# Altium PCB PES_BOARD_V2023.PcbDoc (part 3 of 3)
Units mm, origin at the board's own origin, x right, y up, seen from the top; angles counter-clockwise.
Board outline 110.62 x 70.82 mm, 2 copper layers (Top Layer, Bottom Layer), stack 0.325 mm thick; 197 components, 152 nets, 714 pads, 351 vias.
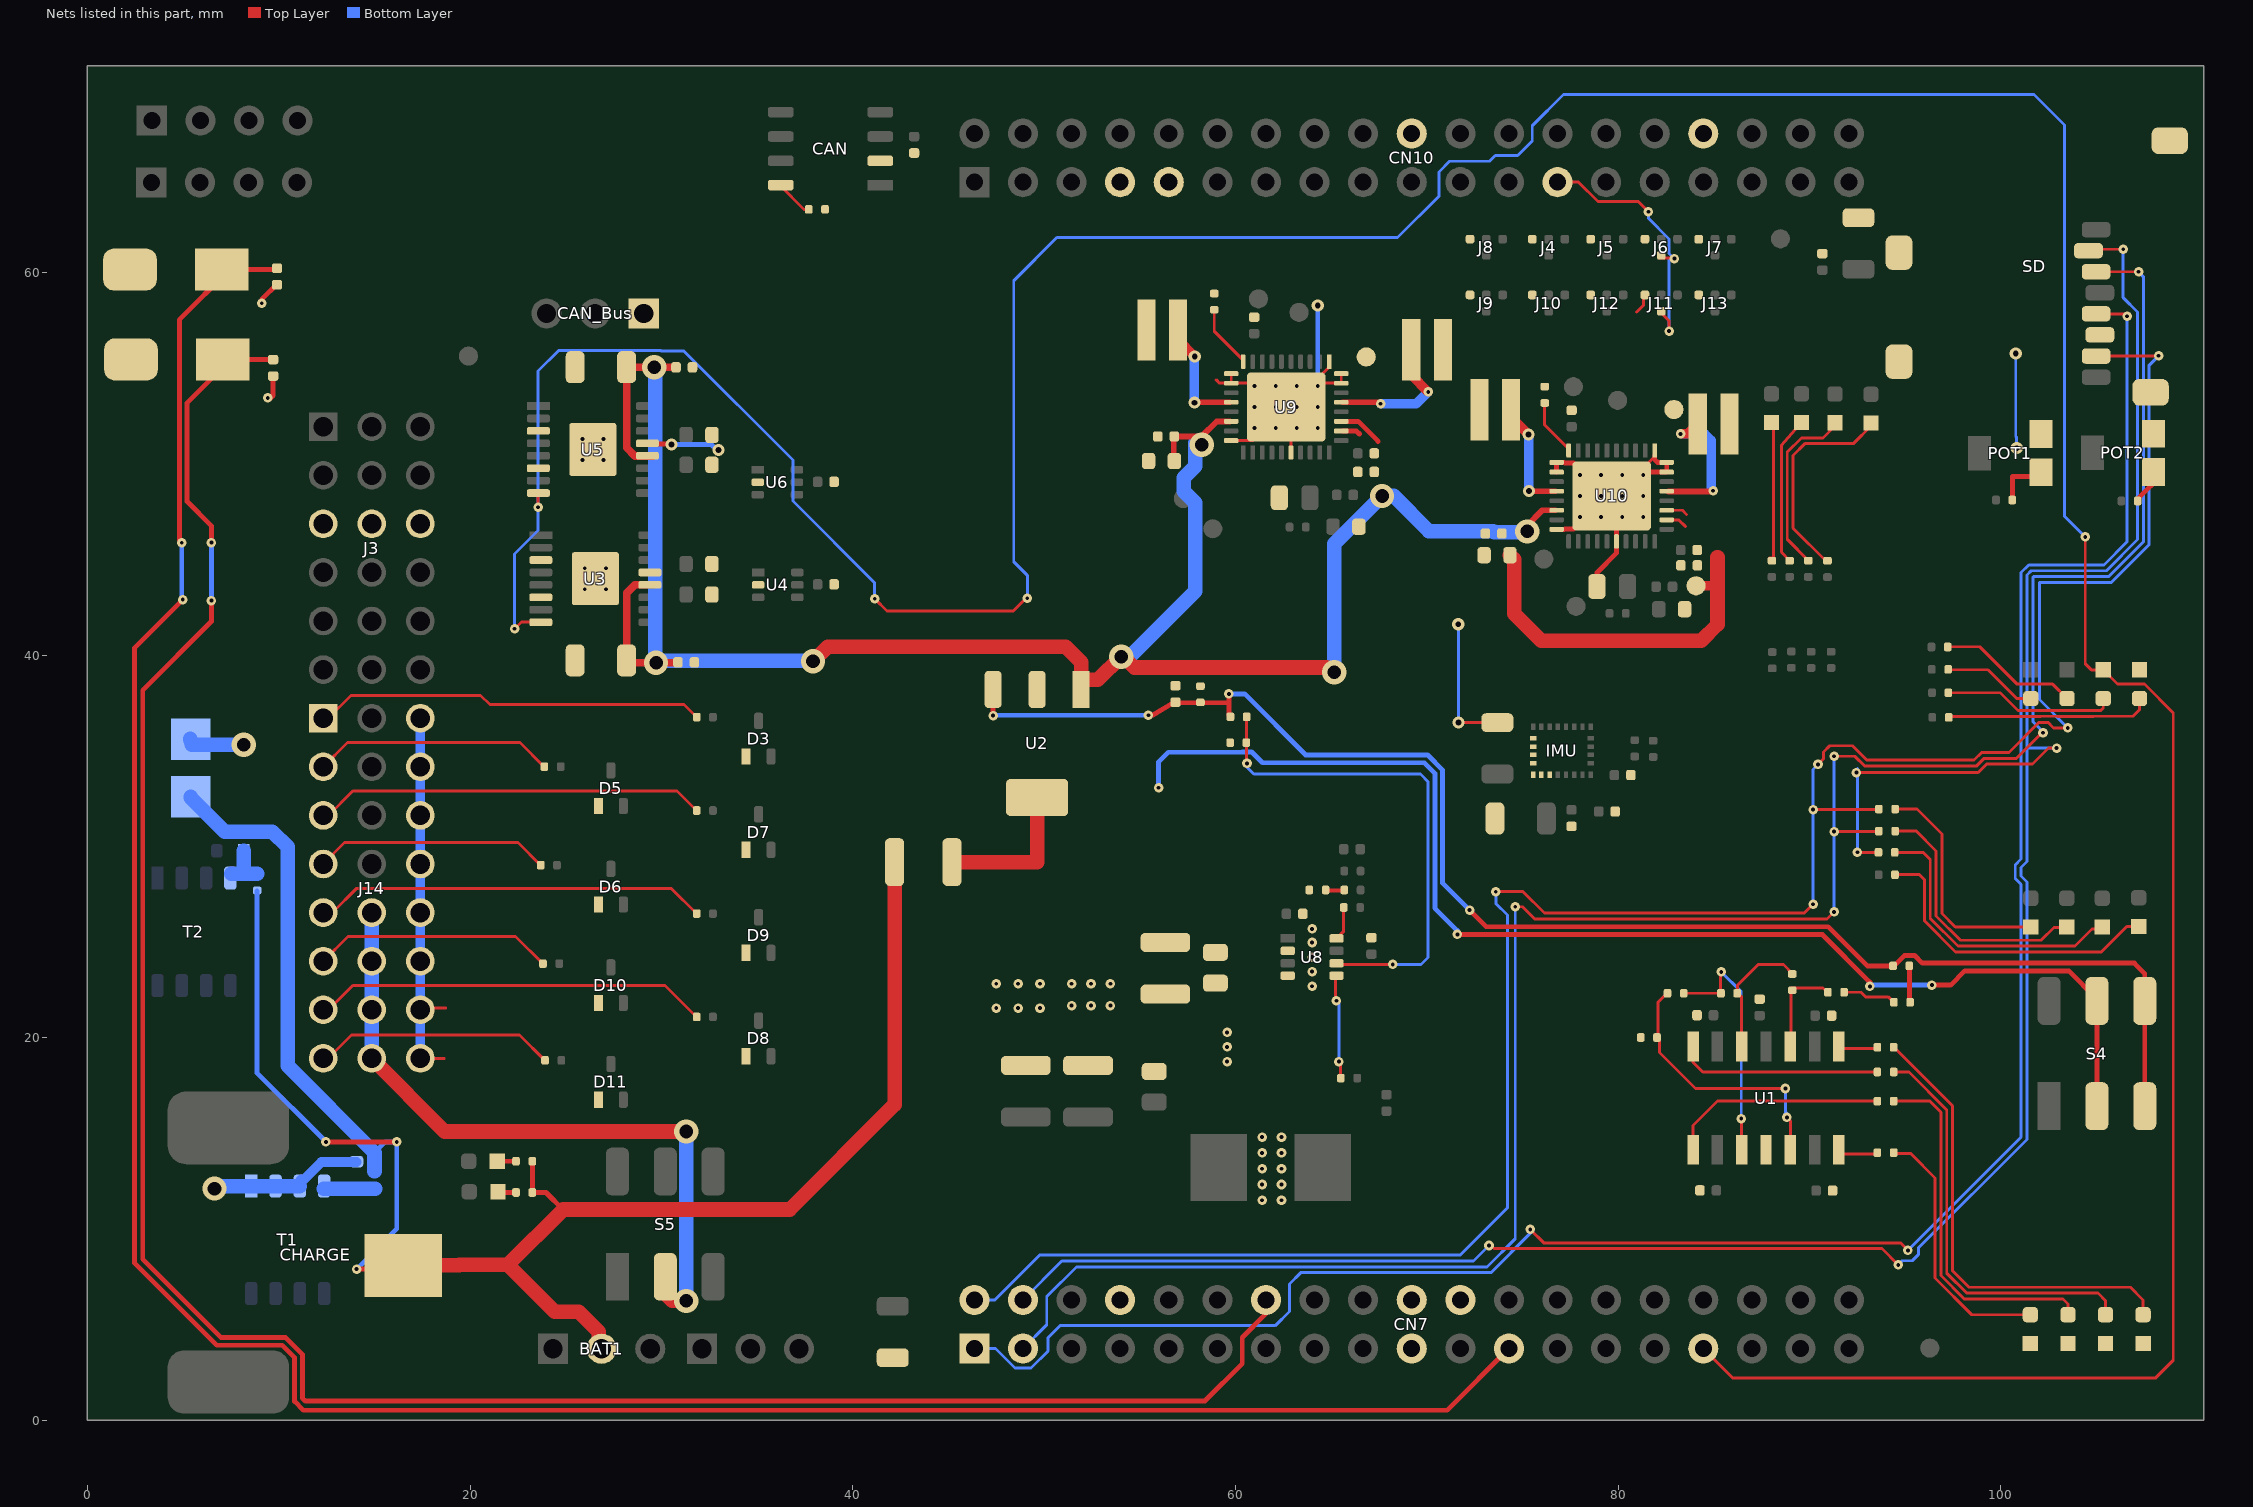
[diagram p3: the nets of this part, all layers, seen from the top]

## Via types
v1: diameter 0.5, hole 0.2, Top Layer to Bottom Layer, 294 vias
v2: diameter 0.635, hole 0.305, Top Layer to Bottom Layer, 30 vias
v3: diameter 1.27, hole 0.711, Top Layer to Bottom Layer, 23 vias
v4: diameter 4.5, hole 3.5, Top Layer to Bottom Layer, 3 vias
v5: diameter 0.5, hole 0.2, Top Layer to Bottom Layer, tented both sides, 1 vias

## Nets (pads, with @x,y where several pads share a name; then routed paths per layer and width w, separated by ;. In a path a pad name is that pad's centre, name@x,y a point inside that pad or via, vN(x,y) a via of type N, cw(c..) or ccw(c..) an arc to the next point about the centre after c; other vN are vias at no path point) (continued)
"NetCAN RX_2": "CAN RX.2" R2.1 | length 7.3
  Top Layer w0.152: R2.1@97.245,40.425 98.903,40.437 100.859,38.481 102.717,38.481 103.467,37.731
"NetCAN TX_2": "CAN TX.2" R7.1 | length 4.9
  Top Layer w0.152: R7.1@97.265,39.255 99.344,39.226 100.839,37.731 101.575,37.731
NetCAN_8: CAN.8 RX.2 | length 2
  Top Layer w0.152: CAN.8@36.212,64.542 37.457,63.297 RX.2@37.684,63.297
"NetDRV ERR 1_1": "DRV ERR 1.1" R68.1 | length 7.4
  Top Layer w0.152: 87.915,52.005 88.125,51.795 88.125,45.078 87.915,45.078 R68.1@88.041,44.952
"NetDRV ERR 2_1": "DRV ERR 2.1" R25.1 | length 9.3
  Top Layer w0.152: R25.1@89.941,44.952 88.84,46.053 88.84,50.61 89.585,51.355 90.704,51.355 91.354,52.005 91.425,52.015
NetEMPTY_2: EMPTY.2 R16.2 | length 24.3
  Top Layer w0.152: R16.2@94.42,19.507 97.485,16.442 97.485,7.822 98.347,6.96 106.782,6.96 107.442,6.299 EMPTY.2@107.442,5.525
NetFULL_2: FULL.2 R27.2 | length 13.6
  Top Layer w0.152: R27.2@94.455,13.945 95.301,13.945 96.571,12.675 96.571,7.443 98.489,5.525 FULL.2@101.549,5.525
NetHALF_2: HALF.2 R24.2 | length 19
  Top Layer w0.152: R24.2@94.42,16.688 96.292,16.688 96.876,16.104 96.876,7.569 98.095,6.35 103.251,6.35 103.513,6.088 HALF.2@103.513,5.525
"NetIMU SDA_1": "IMU SDA.1" R29.1 | length 16.2
  Top Layer w0.152: R29.1@94.486,28.524 95.747,28.524 96.012,28.259 96.012,26.113 97.64,24.486 105.258,24.486 106.591,25.818 107.213,25.818
"NetIND PLS 1_1": "IND PLS 1.1" R67.1 | length 7.6
  Top Layer w0.152: R67.1@88.965,44.952 88.535,45.381 88.535,50.962 89.445,52.005
"NetIND PLS 2_1": "IND PLS 2.1" R23.1 | length 11.2
  Top Layer w0.152: R23.1@90.889,44.89 89.145,46.635 89.145,50.435 89.76,51.05 92.295,51.05 93.242,51.996 93.385,52.015
NetJ1_2: J1.2 U10.10 | length 3
  Top Layer w0.152: J1.2@76.165,53.166 76.165,52.034 77.46,50.739 U10.10@77.46,50.736
NetJ2_2: J2.2 U9.10 | length 3.2
  Top Layer w0.152: J2.2@58.895,58.035 58.895,56.925 U9.10@60.405,55.416
NetJ14_1: J14.1 R51.2 | length 20.5
  Top Layer w0.152: J14.1@12.319,36.703 12.573,36.703 13.767,37.897 20.549,37.897 21.032,37.414 31.173,37.414 R51.2@31.826,36.761
NetJ14_4: J14.4 R49.2 | length 12.6
  Top Layer w0.152: J14.4@12.319,34.163 13.589,35.433 22.605,35.433 R49.2@23.868,34.17
NetJ14_7: J14.7 R41.2 | length 20.5
  Top Layer w0.152: J14.7@12.319,31.623 12.598,31.623 13.868,32.893 30.81,32.893 R41.2@31.826,31.877
NetJ14_10: J14.10 R10.2 | length 12.3
  Top Layer w0.152: J14.10@12.319,29.083 13.437,30.201 22.495,30.201 R10.2@23.673,29.023
NetJ14_13: J14.13 R59.2 | length 20.6
  Top Layer w0.152: J14.13@12.319,26.543 12.802,26.543 14.072,27.813 30.505,27.813 R59.2@31.826,26.492
NetJ14_16: J14.16 R57.2 | length 12.6
  Top Layer w0.152: J14.16@12.319,24.003 13.614,25.298 22.368,25.298 R57.2@23.792,23.875
NetJ14_19: J14.19 R55.2 | length 20.7
  Top Layer w0.152: J14.19@12.319,21.463 12.598,21.463 13.868,22.733 30.183,22.733 R55.2@31.826,21.089
NetJ14_22: J14.22 R8.2 | length 12.6
  Top Layer w0.152: J14.22@12.319,18.923 12.573,18.923 13.792,20.142 22.581,20.142 R8.2@23.901,18.821
NetLED1_1: LED1.1 R40.2 | length 1
  Top Layer w0.254: LED1.1@21.425,13.545 R40.2@22.385,13.545
NetLED2_1: LED2.1 R42.2 | length 0.9
  Top Layer w0.254: LED2.1@21.49,11.915 R42.2@22.385,11.915
NetLOW_2: LOW.2 R20.2 | length 21.8
  Top Layer w0.152: R20.2@94.42,18.212 94.43,18.212 95.199,18.212 97.18,16.231 97.18,7.695 98.221,6.655 105.08,6.655 105.478,6.257 LOW.2@105.478,5.525
  Top Layer w0.254: R20.2@94.43,18.212 R20.2@94.481,18.161
"NetM. EN_2": "M. EN.2" R4.2 | length 10.7
  Top Layer w0.152: R4.2@97.294,36.745 97.334,36.805 97.341,36.798 102.078,36.798 102.085,36.805 102.956,36.805 102.963,36.798 104.857,36.798 104.864,36.805 106.909,36.805 107.251,37.147 107.251,37.731
"NetM. ERR_2": "M. ERR.2" R3.2 | length 9
  Top Layer w0.152: R3.2@97.275,38.035 99.995,38.015 100.908,37.102 101.952,37.102 101.959,37.109 103.082,37.109 103.089,37.102 104.73,37.102 104.737,37.109 105.232,37.109 105.359,37.236 105.359,37.731
NetPOT1_3: POT1.3 R36.2 | length 3.3
  Top Layer w0.254: R36.2@100.618,48.108 100.618,49.335 102.005,49.335 102.295,49.625 POT1.3@102.548,49.625
NetPOT2_3: POT2.3 R37.2 | length 1.9
  Top Layer w0.254: R37.2@107.171,48.057 107.171,48.167 POT2.3@108.433,49.428
NetR5_1: R5.1 U8.5 | length 5.4
  Top Layer w0.152: U8.5@65.236,23.183 65.236,21.974 v1(65.278,21.933) ; v1(65.405,18.758) 65.488,18.674 R5.1@65.488,17.894
  Bottom Layer w0.152: v1(65.278,21.933) 65.405,21.806 v1(65.405,18.758)
NetR9_1: R9.1 U8.8 | length 1.8
  Top Layer w0.152: U8.8@65.236,25.133 65.641,25.538 R9.1@65.641,26.81
NetR11_1: R11.1 R12.2 | length 0.8
  Top Layer w0.203: R12.2@64.737,27.699 R11.1@65.565,27.699
NetR14_1: R14.1 U9.14 | length 6
  Top Layer w0.254: R14.1@56.995,56.486 R14.1@56.995,57.015 ; v2(57.856,53.195) v2@57.876,53.215
  Top Layer w0.3: v2@57.876,53.215 U9.14@59.705,53.215
  Top Layer w0.5: R14.1@56.995,56.486 v2(57.875,55.606)
  Bottom Layer w0.254: v2@57.856,55.587 v2(57.875,55.606)
  Bottom Layer w0.5: v2(57.856,53.195) v2@57.856,55.587
NetR15_1: R15.1 R62.2 | length 1.9
  Top Layer w0.254: R62.2@95.234,21.903 R15.1@95.234,23.76
NetR16_1: R16.1 U1.1 | length 2
  Top Layer w0.152: U1.1@91.542,19.448 R16.1@93.471,19.448
  Top Layer w0.254: U1.1@91.542,19.448 U1.1@91.558,19.431 ; R16.1@93.471,19.448 R16.1@93.53,19.507
NetR17_1: R17.1 R63.1 U1.3 | length 5.2
  Top Layer w0.152: U1.3@89.045,19.491 89.045,22.606 90.711,22.606 R63.1@90.939,22.377
  Top Layer w0.254: U1.3@89.002,19.448 U1.3@89.045,19.491
NetR17_2: R17.2 R22.1 U1.5 | length 6.9
  Top Layer w0.152: U1.5@86.462,19.448 86.462,22.116 86.251,22.327 86.251,22.751 87.325,23.825 88.639,23.825 R17.2@89.103,23.361
NetR18_1: R18.1 U9.33 | length 7.3
  Top Layer w0.254: v1@67.514,53.215 v1(67.588,53.141) ; R18.1@69.194,54.636 R18.1@69.194,55.977
  Top Layer w0.3: U9.33@65.604,53.215 v1@67.514,53.215
  Top Layer w0.5: R18.1@69.194,54.636 v1(70.075,53.755)
  Bottom Layer w0.5: v1(67.588,53.141) 69.461,53.141 v1(70.075,53.755)
NetR20_1: R20.1 U1.7 | length 10.6
  Top Layer w0.152: U1.7@83.922,19.448 83.922,18.72 84.43,18.212 R20.1@93.54,18.212
NetR22_2: R22.2 R26.1 U1.10 | length 13
  Top Layer w0.152: R26.1@83.457,22.327 85.351,22.327 v1@85.351,23.401 ; U1.10@86.462,14.248 v1@86.462,15.748
  Top Layer w0.254: v1@85.351,23.401 v1(85.395,23.444) ; v1(86.436,15.773) v1@86.462,15.748 ; U1.10@86.462,13.928 U1.10@86.462,14.248
  Bottom Layer w0.152: v1(85.395,23.444) 86.436,22.403 v1(86.436,15.773)
NetR24_1: R24.1 U1.8 | length 11.6
  Top Layer w0.152: U1.8@83.922,14.248 83.922,15.418 85.192,16.688 R24.1@93.54,16.688
  Top Layer w0.254: U1.8@83.922,13.928 U1.8@83.922,14.248
NetR26_2: R26.2 R28.1 U1.12 | length 14.4
  Top Layer w0.152: R28.1@82.093,19.932 82.093,21.862 R26.2@82.557,22.327 ; R28.1@82.169,20.015 82.169,19.228 84.049,17.348 v1(88.748,17.348) ; v1(88.824,15.837) 89.002,15.659 U1.12@89.002,14.248
  Top Layer w0.254: U1.12@89.002,13.928 U1.12@89.002,14.248
  Bottom Layer w0.152: v1@88.748,15.977 v1(88.748,17.348)
  Bottom Layer w0.254: v1(88.748,17.348) v1@88.748,17.374 ; v1@88.798,16.027 88.748,15.977 88.824,15.9 v1(88.824,15.837)
NetR27_1: R27.1 U1.14 | length 2
  Top Layer w0.152: U1.14@91.542,13.928 R27.1@93.54,13.928
NetR30_1: "SD CS.1" R30.1 | length 15.1
  Top Layer w0.152: R30.1@94.475,29.693 95.937,29.693 96.317,29.313 96.317,26.24 97.766,24.79 103.878,24.79 104.769,25.681 105.197,25.681 105.308,25.793
NetR31_1: "SD MISO.1" R31.1 | length 12.1
  Top Layer w0.152: R31.1@94.496,31.953 95.631,31.953 96.926,30.658 96.926,26.492 97.626,25.793 101.575,25.793
NetR32_1: "SD MOSI.1" R32.1 | length 13.7
  Top Layer w0.152: R32.1@94.496,30.802 95.589,30.802 96.622,29.769 96.622,26.366 97.892,25.095 102.108,25.095 102.78,25.767 103.48,25.767 103.454,25.793
NetR38_2: R38.2 T1.4 ZD2.1 | length 2.7
  Bottom Layer w0.762: T1.4@12.345,12.117 R38.2@15.03,12.117
NetR39_2: R39.2 T2.4 ZD1.1 | length 2.5
  Bottom Layer w0.762: T2.4@7.526,28.565 8.165,28.565 ; ZD1.1@8.165,29.77 8.165,28.565 ; R39.2@8.868,28.565 8.165,28.565
NetR62_1: R62.1 R63.2 | length 2.8
  Top Layer w0.152: R63.2@91.829,22.377 92.701,22.377 92.939,22.139 94.118,22.139 R62.1@94.401,21.855
NetR69_1: R69.1 U10.14 | length 6.1
  Top Layer w0.152: R69.1@74.405,52.445 R69.1@74.405,52.845 ; v2@75.345,48.576 v2(75.351,48.57)
  Top Layer w0.3: v2(75.351,48.57) U10.14@76.715,48.57
  Top Layer w0.5: R69.1@74.405,52.445 v2(75.325,51.525)
  Bottom Layer w0.152: v2@75.325,48.593 75.345,48.613 75.351,48.607 v2(75.351,48.57)
  Bottom Layer w0.5: v2@75.325,48.593 v2(75.325,51.525)
NetR70_1: R70.1 U10.33 | length 8
  Top Layer w0.152: U10.33@82.615,48.57 U10.33@82.632,48.554 ; R70.1@84.167,52.094 R70.1@84.222,52.094 ; v1@84.897,48.554 84.914,48.536 v1(84.967,48.589)
  Top Layer w0.3: U10.33@82.632,48.554 v1@84.897,48.554
  Top Layer w0.5: v1(83.265,51.565) 83.638,51.565 R70.1@84.167,52.094
  Bottom Layer w0.152: v1@84.867,48.689 v1(84.967,48.589)
  Bottom Layer w0.5: v1(83.265,51.565) 84.529,51.565 84.867,51.227 v1@84.867,48.689
NRST: C8.2 CN7.14 Reset.1 | length 118.7
  Top Layer w0.254: v1(6.477,42.85) 6.477,41.758 2.886,38.167 2.886,8.421 6.969,4.339 10.346,4.339 11.231,3.454 11.231,1.165 11.38,1.016 58.401,1.016 60.354,2.969 60.354,4.333 61.595,5.574 CN7.14@61.595,6.299 ; v1(6.477,45.884) 6.477,46.761 5.207,48.031 5.207,53.188 7.474,55.455 C8.2@9.665,55.455
  Bottom Layer w0.254: v1(6.477,42.85) v1(6.477,45.884) v1@6.477,45.923
SCK: CN10.25 J6.3 J11.3 | length 14.2
  Top Layer w0.152: CN10.25@76.835,64.719 77.938,64.719 78.954,63.703 81.057,63.703 v1(81.585,63.175) ; J6.3@82.174,60.746 82.924,60.746 v1(82.945,60.725) ; J11.3@82.201,57.945 82.665,57.481 v1(82.665,56.935)
  Bottom Layer w0.152: v1(81.585,63.175) 81.585,62.835 82.665,61.755 82.665,60.985 82.925,60.725 v1(82.945,60.725) ; v1(82.665,56.935) 82.665,60.725
SD_CS: CN7.4 R30.2 SD.2 | length 128.8
  Top Layer w0.152: v1(73.254,9.144) 73.348,9.144 73.513,8.979 93.789,8.979 v1(94.64,8.128) ; v1(92.456,33.858) 98.821,33.858 99.266,34.303 101.663,34.303 102.5,35.139 v1(102.921,35.139) ; v1(92.507,29.693) R30.2@93.595,29.693 ; SD.2@104.66,61.214 v1(106.401,61.214)
  Bottom Layer w0.152: CN7.4@48.895,6.299 50.927,8.331 72.441,8.331 v1(73.254,9.144) ; v1(92.456,33.858) 92.456,34.019 92.507,34.07 v1(92.507,29.693) ; v1(94.64,8.128) 94.856,8.344 95.375,8.344 95.694,8.664 95.694,9.005 101.367,14.678 101.367,28.148 101.062,28.453 101.062,28.905 101.371,29.214 101.371,35.139 ; v1(102.921,35.139) 101.371,35.139 ; v1(106.401,61.214) 106.401,58.684 107.15,57.935 107.15,46.04 105.522,44.412 101.595,44.412 101.371,44.189 101.371,35.139
SD_MISO: CN7.2 R31.2 SD.7 | length 117.8
  Top Layer w0.152: v1(73.609,27.635) 75.032,27.635 76.149,26.518 89.73,26.518 v1(90.195,26.983) ; v1@90.221,31.953 v1(90.195,31.928) 93.591,31.928 R31.2@93.616,31.953 ; v1(90.449,34.291) 90.742,34.583 90.742,34.942 91.061,35.261 92.256,35.261 92.999,34.519 98.61,34.519 99.004,34.912 100.43,34.912 102.005,36.487 102.464,36.487 102.756,36.195 v1(103.505,36.195) ; SD.7@104.985,55.629 108.233,55.629 v1(108.255,55.651)
  Bottom Layer w0.152: CN7.2@46.355,6.299 47.422,6.299 49.759,8.636 71.739,8.636 74.219,11.116 74.219,26.41 73.609,27.02 v1(73.609,27.635) ; v1(90.195,26.983) 90.195,34.028 90.449,34.282 v1(90.449,34.291) ; v1(103.505,36.195) 102.019,37.681 102.019,43.802 105.775,43.802 107.759,45.787 107.759,55.156 v1(108.255,55.651)
SD_MOSI: CN7.3 R32.2 SD.3 | length 117
  Top Layer w0.152: v1(74.625,26.848) 75.01,26.848 75.645,26.213 90.926,26.213 v1(91.291,26.578) ; v1(91.288,34.715) 92.371,34.715 92.873,34.214 95.911,34.214 ; v1(91.291,30.773) R32.2@93.587,30.773 ; 95.961,34.214 98.746,34.214 99.139,34.608 100.825,34.608 102.159,35.941 v1(102.21,35.941) ; SD.3@104.985,60.039 v1(107.207,60.039)
  Bottom Layer w0.152: CN7.3@48.895,3.759 50.14,5.004 50.14,6.477 51.689,8.026 73.152,8.026 74.625,9.5 v1(74.625,26.848) ; v1(91.288,34.715) 91.288,34.138 91.291,34.134 v1(91.291,30.773) v1(91.291,26.578) ; v1(102.21,35.941) 102.21,35.992 101.676,36.525 101.676,44.062 101.721,44.107 105.648,44.107 107.455,45.913 107.455,59.776 107.207,60.024 v1(107.207,60.039)
SD_SCK: CN7.1 SD.5 | length 111.8
  Top Layer w0.152: v1(75.414,9.985) 76.116,9.284 94.755,9.284 v1(95.148,8.89) ; SD.5@104.985,57.839 106.473,57.839 v1(106.604,57.709)
  Bottom Layer w0.152: CN7.1@46.355,3.759 47.458,3.759 48.474,2.743 49.316,2.743 49.341,2.769 49.348,2.769 50.199,3.619 50.199,4.325 50.826,4.953 62.078,4.953 62.819,5.694 62.819,7.128 63.412,7.721 73.355,7.721 75.414,9.78 v1(75.414,9.985) ; v1(95.148,8.89) 101.062,14.804 101.062,28.022 100.757,28.326 100.757,29.031 101.067,29.34 101.067,44.315 101.468,44.717 105.396,44.717 106.604,45.925 v1(106.604,57.709)
STATE_MOTOR: "M. ERR.1" CN7.31 U3.8 U5.8 | length 221.1
  Top Layer w0.152: v1(22.327,41.377) 22.338,41.377 22.688,41.727 U3.8@23.552,41.727 ; v1(23.552,47.733) U5.8@23.552,48.458 ; v1(41.145,42.945) 41.786,42.304 48.385,42.304 49.058,42.977 v1(49.115,42.977) ; CN7.31@84.455,3.759 86.004,2.21 108.077,2.21 109.017,3.15 109.017,36.979 107.511,38.485 106.105,38.485 105.359,39.231 104.736,39.231 104.419,39.548 v1(104.419,46.177)
  Bottom Layer w0.152: v1(22.327,41.377) 22.327,45.288 23.552,46.513 v1(23.552,47.733) 23.552,54.845 24.621,55.914 29.974,55.914 29.983,55.905 31.158,55.905 36.869,50.195 36.869,48.051 41.145,43.775 v1(41.145,42.945) ; v1(49.115,42.977) 49.124,42.985 49.124,44.171 48.415,44.879 48.415,59.573 50.666,61.824 68.478,61.824 70.637,63.983 70.637,65.253 71.196,65.811 73.278,65.811 73.583,66.116 74.752,66.116 75.514,66.878 75.514,67.674 77.141,69.301 101.742,69.301 103.34,67.703 103.34,47.256 v1(104.419,46.177)
UC_GND: 36_TST_MODE.1 36_TST_MODE_2.1 "M. EN.1" C1.1 C2.1 C3.1 C4.1 C7.1 C8.1 C9.2 C10.1 C11.2 C12.1 C13.2 C14.1 C15.1 C16.1 C17.1 C18.2 C19.2 C20.2 C21.1 C22.1 C23.1 C24.2 C25.2 C26.1 C27.1 C28.1 C29.1 C30.1 C31.2 C32.2 C33.2 C36.2 C37.2 C48.2 C49.2 C50.2 C51.2 C52.2 C53.2 C55.2 C58.2 C59.2 C60.2 C61.2 C62.2 C202.2 CAN.2 CAN_Bus.1 CN7.8 CN7.19 CN7.20 CN7.22 CN10.9 CN10.20 CN10.32 D1.2 D3.1 D5.1 D6.1 D7.1 D8.1 D9.1 D10.1 D11.1 EMPTY.1 FULL.1 HALF.1 IMU.14 IMU.15 IMU.16 IMU.17 IMU.18 IMU.19 IMU.20 J1.1 J2.1 J3.7 J3.8 J3.9 J4.2 J5.2 J6.2 J7.2 J8.2 J9.2 J10.2 J11.2 J12.2 J13.2 J14.3 J14.6 J14.9 J14.12 J14.15 J14.18 J14.21 J14.24 LOW.1 POT1.1 POT2.1 R1.1 R12.1 R14.2 R18.2 R28.2 R61.1 R69.2 R70.2 Reset.2 RX.1 SD.6 SD.11 SD.12 SD.13 SD.14 T1.1 T1.2 T1.3 U1.11 U2.2 U3.3 U3.6 U3.13 U3.17 U4.2 U5.3 U5.6 U5.13 U5.17 U6.2 U8.4 U9.1 U9.11 U9.12 U9.18 U9.24 U9.35 U9.36 U9.37 U10.1 U10.11 U10.12 U10.18 U10.24 U10.35 U10.36 U10.37 User.2 ZD2.2 | length 90.1
  Top Layer w0.152: J14.24@17.399,18.923 18.649,18.923 ; J14.21@17.399,21.463 17.488,21.552 18.725,21.552 ; 58.993,54.388 59.166,54.215 U9.12@59.78,54.215 ; U9.18@59.705,51.215 60.904,51.215 U9.37@62.655,52.965 ; U9.11@59.705,54.716 59.78,54.716 U9.12@59.78,54.215 ; U9.37@61.005,54.215 U9.12@59.78,54.215 ; U9.24@62.904,50.515 62.904,52.716 U9.37@62.655,52.965 62.849,52.965 64.565,54.681 64.565,54.713 64.856,55.005 64.856,55.291 U9.1@64.905,55.34 ; U9.37@64.305,54.215 65.53,54.215 U9.36@65.53,54.715 U9.36@65.604,54.716 ; v2(71.655,36.476) 71.658,36.479 C10.1@73.691,36.479 ; U10.37@79.86,48.32 81.11,49.57 81.867,50.327 81.867,50.396 81.884,50.412 U10.1@81.916,50.412 ; 80.973,57.935 81.322,58.284 J11.2@81.322,58.825 ; v2(100.785,55.762) 100.805,55.782 v2@100.805,55.795
  Top Layer w0.254: v1(9.111,58.395) 9.111,58.597 C7.1@9.906,59.392 ; v1(9.423,53.442) 9.585,53.442 9.703,53.559 C8.1@9.703,54.616 ; U5.13@29.265,51.07 29.295,51.04 30.488,51.04 v2(30.518,51.01) ; U10.18@76.791,46.57 77.182,46.57 77.212,46.599 77.667,46.599 79.388,48.32 U10.37@79.665,48.32 ; U10.12@76.791,49.57 U10.11@76.791,50.07 77.182,50.07 77.212,50.04 77.667,50.04 78.137,49.57 78.415,49.57 U10.37@79.665,48.32 ; C55.2@78.9,43.585 78.9,44.31 79.915,45.325 79.915,48.07 U10.37@79.666,48.32 ; U10.37@81.11,49.57 80.915,49.57 U10.37@79.665,48.32 ; U10.37@81.316,49.57 U10.35@82.541,49.57 U10.36@82.541,50.07 ; U10.1@81.916,50.445 81.916,50.218 82.065,50.07 U10.36@82.293,50.07
  Bottom Layer w0.152: v2(71.645,41.615) 71.655,41.605 v2(71.655,36.476) ; v2(100.785,55.762) 100.785,51.434 100.835,51.384 v2(100.835,50.817)
  Bottom Layer w0.254: v2(30.518,51.01) 32.604,51.01 32.885,50.729 v2(32.988,50.729) ; v1(64.305,54.065) v2(64.305,58.268)
  Bottom Layer w0.5: J14.24@17.399,18.923 J14.21@17.399,21.463 ; J14.3@17.399,36.703 J14.6@17.399,34.163 J14.9@17.399,31.623 J14.12@17.399,29.083 J14.15@17.399,26.543 J14.18@17.399,24.003 J14.21@17.399,21.463 ; J14.21@17.488,21.552 J14.21@17.399,21.463
  Bottom Layer w0.508: T1.3@11.1,12.25 11.1,12.525 11.171,12.596 11.311,12.596 12.22,13.505 ZD2.2@14.065,13.505
  Bottom Layer w0.762: D1.2@5.365,35.625 5.463,35.31 5.475,35.322 v3(8.165,35.322) ; v3(6.642,12.117) 6.779,12.117 6.912,12.25 T1.1@8.56,12.25 T1.2@9.83,12.25 T1.3@11.1,12.25
  other v1: 61.392,11.506 61.392,12.332 62.408,12.332 61.392,13.157 62.408,13.157 61.392,13.983 62.408,13.983 61.392,14.808 62.408,14.808 59.563,18.758 59.563,19.52 59.563,20.282 47.498,21.552 48.641,21.552 49.784,21.552 51.435,21.679 52.451,21.679 53.467,21.679 64.008,22.695 47.498,22.822 48.641,22.822 49.784,22.822 51.435,22.822 52.451,22.822 53.467,22.822 64.008,23.457 64.008,24.219 64.008,24.981 64.008,25.692 25.995,43.445 27.095,43.445 25.995,44.545 27.095,44.545 78.016,47.22 79.116,47.22 80.216,47.22 81.316,47.22 78.016,48.32 79.116,48.32 80.216,48.32 81.316,48.32 78.016,49.42 79.116,49.42 80.216,49.42 81.316,49.42 25.865,50.195 26.965,50.195 25.865,51.295 26.965,51.295 61.005,51.865 62.105,51.865 63.205,51.865 64.305,51.865 61.005,52.965 62.105,52.965 63.205,52.965 64.305,52.965 61.005,54.065 62.105,54.065 63.205,54.065
  other v5: 62.408,11.506
USER_BUTTON: C7.2 CN7.23 User.1 | length 134.3
  Top Layer w0.254: v1(4.928,45.875) 4.801,46.002 4.801,57.531 7.423,60.154 C7.2@9.868,60.154 ; v1(4.978,42.901) 2.465,40.387 2.465,8.225 6.758,3.932 6.958,3.932 10.177,3.932 10.824,3.285 10.824,0.996 11.287,0.533 71.069,0.533 CN7.23@74.295,3.759
  Bottom Layer w0.254: v1(4.928,45.875) 4.928,42.951 v1(4.978,42.901)
V_BAT: C3.2 C4.2 F1.2 S4.2 S4.5 U2.4 U8.2 | length 74.4
  Top Layer w0.254: v1(71.603,25.4) 90.678,25.4 93.165,22.913 v1(93.165,22.685) ; v1(96.406,22.751) 97.386,22.751 98.13,23.495 103.561,23.495 105.029,22.027 S4.2@105.029,16.327
  Top Layer w0.762: F1.2@45.118,29.185 F1.2@45.188,29.185 49.632,29.185 U2.4@49.632,32.407
  Bottom Layer w0.254: v1(55.982,33.071) 55.982,34.417 56.49,34.925 60.344,34.925 60.357,34.938 60.852,34.938 61.417,34.373 69.875,34.373 70.426,33.822 70.426,26.776 71.603,25.599 v1(71.603,25.4) ; v1(93.165,22.685) 93.231,22.751 v1(96.406,22.751)
V_BAT_ON: C1.2 R1.2 R15.2 R60.1 S4.3 S4.6 U2.3 | length 80.3
  Top Layer w0.254: v1(47.332,36.841) U2.3@47.332,38.357 ; v1(55.448,36.855) 55.67,36.855 56.865,37.571 56.923,37.513 58.172,37.513 59.659,37.513 ; v1(59.659,37.973) 59.659,37.513 ; R60.1@59.724,36.774 59.659,36.839 59.659,37.513 ; v1(72.238,26.67) 73.101,25.806 90.983,25.806 90.983,25.804 93.026,23.76 94.354,23.76 94.354,23.688 94.973,24.308 95.494,24.308 95.901,23.901 106.985,23.901 107.529,23.357 107.529,22.027 S4.3@107.529,16.327
  Bottom Layer w0.254: v1(47.332,36.841) 47.346,36.855 v1(55.448,36.855) ; v1(59.659,37.973) 60.477,37.973 63.671,34.779 70.044,34.779 70.833,33.99 70.833,28.075 v1(72.238,26.67)
V_Bat_ON_5V: R60.2 R61.2 U8.6 | length 26.6
  Top Layer w0.152: v1(60.604,34.341) 60.587,34.358 60.587,35.428 60.587,36.757 R60.2@60.604,36.774 ; U8.6@65.236,23.833 v1(68.224,23.833)
  Bottom Layer w0.152: v1(60.604,34.341) 60.604,34.138 60.96,33.782 69.672,33.782 70.071,33.384 70.071,24.198 69.706,23.833 v1(68.224,23.833)
V_Bat_RAW: BAT1.2 CHARGE.1 D1.1 F1.1 R38.1 R39.1 R40.1 R42.1 | length 107.5
  Top Layer w0.254: v1(12.465,14.557) 16.162,14.557 16.165,14.554 v1(16.165,14.557) ; v1(14.065,7.912) 16.319,7.912 CHARGE.1@16.51,8.103 ; R40.1@23.265,13.545 23.265,11.915 23.965,11.915 24.861,11.019
  Top Layer w0.762: CHARGE.1@16.51,8.103 19.434,8.103 ; 19.435,8.128 21.969,8.128 ; BAT1.2@26.875,3.749 26.719,3.905 26.719,4.635 25.685,5.669 24.428,5.669 21.969,8.128 ; F1.1@42.188,29.185 42.188,16.514 36.697,11.024 24.861,11.024 24.861,11.019 21.969,8.128
  Bottom Layer w0.254: R39.1@8.868,27.685 8.868,18.154 v1(12.465,14.557) ; v1(14.065,7.912) 16.165,10.012 v1(16.165,14.557) 15.561,14.557 14.852,13.848
  Bottom Layer w0.762: D1.1@5.4,32.6 5.4,32.55 7.177,30.773 9.665,30.773 10.459,29.979 10.459,18.541 15.002,13.998 R38.1@15.002,13.031
V_Motor: 16_31_VS_2.1 C17.2 C18.1 C23.2 C24.1 C32.1 C33.1 C34.2 C51.1 C57.2 C58.1 C59.1 C60.1 U2.1 U3.12 U5.12 U9.16 U9.30 U9.31 U10.16 U10.30 U10.31 | length 133.9
  Top Layer w0.152: v3(75.251,46.465) v3@75.251,46.781 ; U10.16@76.715,47.536 U10.16@76.76,47.536 ; U10.30@82.615,47.07 83.176,47.07 83.515,46.731 ; U10.31@82.615,47.57 83.363,47.57 83.578,47.355 ; 85.167,43.625 85.196,43.654
  Top Layer w0.254: U9.30@65.604,51.716 66.325,51.716 66.485,51.556 ; U9.31@65.604,52.215 66.411,52.215 67.458,51.168 ; v3(67.665,48.32) v3@67.665,48.435
  Top Layer w0.3: C33.1@56.81,50.145 56.775,50.18 56.775,51.431 C32.1@56.805,51.431 57.979,51.431 v3@58.108,51.303 ; v3(58.244,50.995) 58.244,51.439 59.021,52.215 U9.16@59.705,52.215 ; v3@75.251,46.781 76.04,47.57 U10.16@76.715,47.57
  Top Layer w0.406: U3.12@29.552,43.677 28.614,43.677 28.181,43.243 28.181,39.726 28.308,39.599 v3(29.718,39.599) C17.2@30.766,39.599 ; U5.12@29.552,50.408 28.612,50.408 28.181,50.838 28.181,55.051 v3(29.616,55.051) C23.2@30.521,55.051
  Top Layer w0.5: 16_31_VS_2.1@84.095,43.625 85.167,43.625
  Top Layer w0.762: v3(37.922,39.675) 38.684,40.437 51.13,40.437 51.932,39.635 U2.1@51.932,38.659 ; U2.1@51.932,38.357 U2.1@51.932,38.659 ; v3(65.16,39.098) 65.023,39.098 64.769,39.352 54.726,39.352 54.162,39.915 v3(54.025,39.915) 52.813,38.703 51.976,38.703 U2.1@51.932,38.659 ; C59.1@74.35,45.225 74.565,45.01 74.565,42.155 75.978,40.742 84.337,40.742 85.196,41.6 85.196,43.654 85.196,45.121
  Bottom Layer w0.762: v3@29.515,55.016 29.667,54.864 29.667,39.7 37.897,39.7 v3(37.922,39.675) ; v3(54.025,39.915) 54.465,39.915 57.895,43.345 57.895,47.974 57.3,48.569 57.3,49.273 57.895,49.868 57.895,51.09 57.99,50.995 v3(58.244,50.995) ; v3(65.16,39.098) 65.16,45.815 v3(67.665,48.32) 68.27,48.32 70.116,46.474 70.108,46.465 73.473,46.465 73.518,46.421 75.207,46.421 v3(75.251,46.465)
VCC_digital: J14.14 J14.17 J14.20 J14.23 S5.2 | length 36.7
  Top Layer w0.762: J14.23@14.859,18.923 18.682,15.1 v3(31.3,15.1) ; S5.2@30.186,7.544 30.186,6.63 30.571,6.245 v3(31.295,6.245)
  Bottom Layer w0.762: J14.23@14.859,18.923 J14.20@14.859,21.463 J14.17@14.859,24.003 J14.14@14.859,26.543 ; v3(31.295,6.245) 31.298,6.248 31.298,15.098 v3(31.3,15.1)
VDDA+: CN10.7
pads on no net: CAN.5 CHARGE.3 CN7.7 CN7.9 CN7.10 CN7.11 CN7.12 CN7.13 CN7.15 CN7.24 CN7.25 CN7.26 CN7.27 CN7.29 CN7.33 CN7.34 CN7.36 CN7.38 CN10.3 CN10.5 CN10.10 CN10.11 CN10.15 CN10.18 CN10.27 CN10.31 CN10.35 CN10.36 CN10.37 CN10.38 F2.1 F3.1 F4.1 IMU.5 IMU.6 IMU.9 IMU.10 IMU.11 IMU.12 IMU.13 S4.1 S4.4 S5.4 S5.5 S5.6 SD.1 SD.8 U5.5 U5.7 U5.9 U5.10 U6.3 U6.4 U9.9 U9.17 U10.9 U10.17
copper on no net:
  other v4: 42.065,11.425 94.565,44.425 43.065,59.925

## Polygon pours and split planes (outlines as drawn)
M2_OA1 on Top Layer "M2_OA1_L01_P085" (solid, pour order 85): 83.345,48.589 83.345,49.235 83.35,49.235 83.946,49.831 87.445,49.831 87.445,48.695 87.315,48.565
M2_OA2 on Top Layer "M2_OA2_L01_P086" (solid, pour order 86): 83.335,48.475 86.381,48.475 86.741,48.115 86.741,47.025 84.118,47.025 83.985,47.158 83.985,47.835 83.437,47.835 83.345,47.927
M2_OB2 on Top Layer "M2_OB2_L01_P087" (solid, pour order 87): 75.99,48.536 75.99,48.07 75.095,47.175 73.275,47.175 73.275,48.214 73.615,48.554
M2_OB1 on Top Layer "M2_OB1_L01_P088" (solid, pour order 88): 76.015,48.675 76.017,48.677 76.017,49.259 75.355,49.921 75.355,50.575 72.085,50.575 71.665,50.155 71.665,48.675
V_Motor on Top Layer "V_MOTOR_L01_P089" (solid, pour order 89): 83.323,47.585 83.323,46.245 83.735,45.832 83.735,44.175 85.359,44.175 85.579,44.395 85.575,44.399 85.575,46.795 85.45,46.92 83.99,46.92 83.855,47.055 83.855,47.589
V_Motor on Top Layer "V_MOTOR_L01_P090" (solid, pour order 90): 75.667,47.137 74.003,47.137 73.532,46.665 73.532,44.161 74.047,43.645 75.01,43.645 75.932,44.567 75.932,46.939
M1_OA1 on Top Layer "M1_OA1_L01_P091" (solid, pour order 91): 66.505,54.022 67.19,54.708 69.115,54.708 69.115,53.353 69.045,53.283 66.496,53.283
M1_OA2 on Top Layer "M1_OA2_L01_P092" (solid, pour order 92): 66.485,52.445 67.385,51.545 69.095,51.545 69.095,53.115 69.025,53.185 66.476,53.185
M1_OB1 on Top Layer "M1_OB1_L01_P093" (solid, pour order 93): 55.599,54.081 56.052,54.535 58.409,54.535 58.906,54.038 58.906,53.535 58.689,53.319 55.611,53.319
M1_OB2 on Top Layer "M1_OB2_L01_P094" (solid, pour order 94): 55.575,52.379 56.029,51.925 58.385,51.925 58.882,52.422 58.882,52.925 58.666,53.141 55.588,53.141
V_Motor on Top Layer "V_MOTOR_L01_P095" (solid, pour order 95): 56.125,49.312 56.138,49.325 58.115,49.325 59.095,50.305 59.095,51.698 58.838,51.955 56.467,51.955 56.467,51.147 56.125,50.805
V_Motor on Top Layer "V_MOTOR_L01_P097" (solid, pour order 97): 66.258,52.245 66.478,52.245 67.371,51.352 68.789,51.352 68.976,51.165 68.976,48.616 67.795,47.435 67.242,47.435 66.877,47.8 66.877,51.145 66.837,51.185 66.518,51.185 66.258,51.446
NetC5_1 on Top Layer "TopMetC14-0_1" (solid, remove dead copper, pour order 106): 63.627,9.868 63.627,16.726 68.453,16.726 68.326,16.599 68.326,13.932 66.929,12.535 66.929,9.868 63.627,9.868
5V on Top Layer "5V_L01_P008" (solid, remove dead copper, pour order 107): 60.071,8.001 60.071,16.726 60.071,16.853 59.563,17.361 46.228,17.361 46.228,8.001
V_BAT on Top Layer "BottomVBAT" (solid, remove dead copper, pour order 108): 46.228,27.648 48.514,27.648 51.308,27.648 54.737,24.219 55.118,23.838 63.373,23.838 63.373,24.727 61.341,24.727 61.341,26.124 57.912,29.553 57.658,29.807 57.658,33.617 46.228,33.617 46.228,28.029 46.228,28.374
UC_GND on Top Layer "TopGND_BAT" (solid, remove dead copper, pour order 109): 46.228,9.868 46.228,33.617 70.104,33.617 70.104,9.868
UC_GND on Top Layer "TopGND" (solid, remove dead copper, pour order 110): 0.033,-0.001 110.65,-0.001 110.65,70.814 0.033,70.814
M1_OA2 on Bottom Layer "M1_OA2_L02_P084" (solid, pour order 84): 68.515,52.883 66.815,52.883 66.875,51.402 66.912,51.365 68.645,51.365 68.885,51.605 68.885,52.883
M2_OA1 on Bottom Layer "M2_OA1_L02_P096" (solid, pour order 96): 85.355,49.815 85.522,49.983 86.715,49.983 86.855,49.843 86.855,48.703 86.757,48.605 85.335,48.605 85.195,48.745 85.195,49.735
M2_OA2 on Bottom Layer "M2_OA2_L02_P098" (solid, pour order 98): 84.325,48.055 84.493,48.223 85.685,48.223 85.825,48.083 85.825,46.942 85.727,46.845 84.305,46.845 84.165,46.985 84.165,47.975
M2_OB1 on Bottom Layer "M2_OB1_L02_P099" (solid, pour order 99): 72.935,50.125 73.102,50.293 74.295,50.293 74.435,50.153 74.435,49.013 74.337,48.915 72.915,48.915 72.775,49.055 72.775,50.045
M1_OB2 on Bottom Layer "M1_OB2_L02_P100" (solid, pour order 100): 56.035,52.985 56.202,53.153 57.395,53.153 57.535,53.013 57.535,51.873 57.437,51.775 56.015,51.775 55.875,51.915 55.875,52.905
M1_OB1 on Bottom Layer "M1_OB1_L02_P101" (solid, pour order 101): 56.085,54.495 56.252,54.663 57.445,54.663 57.585,54.523 57.585,53.383 57.487,53.285 56.065,53.285 55.925,53.425 55.925,54.415
M1_OA1 on Bottom Layer "M1_OA1_L02_P102" (solid, pour order 102): 66.885,54.815 68.565,54.815 68.695,54.685 68.695,53.615 68.515,53.435 66.935,53.435
NetC5_1 on Bottom Layer "NETC14-0_1_L04_P014" (solid, remove dead copper, pour order 103): 68.351,16.726 68.351,14.059 66.446,12.154 66.192,11.9 66.192,9.868 64.033,9.868 63.525,10.376 63.525,17.361 60.223,20.663 60.223,24.727 62.128,24.727 62.128,20.663 66.065,16.726
5V on Bottom Layer "5V_L01_P057" (solid, remove dead copper, pour order 104): 60.096,9.868 60.096,16.726 60.096,16.853 59.588,17.361 46.253,17.361 46.253,9.868
UC_GND on Bottom Layer "BottomGND_BAT" (solid, remove dead copper, pour order 105): 46.253,9.868 46.253,33.617 70.129,33.617 70.129,9.868
3V3 on Bottom Layer "Bottom3V3" (solid, remove dead copper, pour order 111): 0.035,0.004 110.652,0.004 110.652,70.819 0.035,70.819

## Other copper
Top Layer:
  rectangle net GND_BAT: 8.115,6.5 12.815,11
  rectangle net GND_Charge: 3.215,22.6 7.915,27.1
Bottom Layer:
  rectangle net UC_GND: 77.528,45.766 82.925,51.089
  rectangle net UC_GND: 24.613,41.605 28.6,46.38
  rectangle net UC_GND: 24.613,48.26 28.6,53.086
  rectangle net UC_GND: 59.635,50.4 66.023,55.606

## Silkscreen, mask and mechanical layers (free items; w line width, h text height)
Top Overlay:
  drawing of 29 lines, arcs and shapes, not listed
  text "Stepper" at 13.665,69.333 h1.52 r270
  text "M1    M2" at 12.46,69.325 h1.52 r270
  text "CAN H" at 24.607,61.155 h1.52 r90
  text "CAN L" at 27.249,61.155 h1.52 r90
  text "GND" at 29.722,61.155 h1.52 r90
  text "USER" at 10.565,59.229 h1.52
  text "M2 M1" at 70.995,58.035 h1.52 r90
  text "CONFIG / Stepper" at 69.655,57.815 h1.52 r90
  text "STATUS / Stepper" at 87.065,55.942 h1.52
  text "RESET" at 10.765,55.554 h1.52
  text "M1  |  M2" at 87.065,54.673 h1.52
  text "I-" at 103.563,51.66 h0.76 r90
  text "I-" at 97.673,51.64 h0.76 r90
  text "M+" at -0.051,51.029 h1.52
  text "M-" at -0.051,48.475 h1.52
  text "I+" at 97.673,48.327 h0.76 r90
  text "I+" at 103.563,48.347 h0.76 r90
  text "GND" at -0.051,45.921 h1.52
  text "5V" at -0.051,43.368 h1.52
  text "ENC A" at -0.051,40.814 h1.52
  text "ENC B" at -0.051,38.26 h1.52
  text "STATUS" at 99.644,36.652 h1.52 r90
  text "A0" at 18.527,36.443 h0.76
  text "A0:    s   +   -" at -0.051,35.707 h1.52
  text "A1" at 18.527,33.884 h0.76
  text "A1:    s   +   -" at -0.051,33.153 h1.52
  text "A2" at 18.527,31.324 h0.76
  text "A2:    s   +   -" at -0.051,30.599 h1.52
  text "A3" at 18.527,28.765 h0.76
  text "A3:    s   +   -" at -0.051,28.046 h1.52
  text "S0" at 18.527,26.205 h0.76
  text "D0:    s   +   -" at -0.051,25.492 h1.52
  text "COM" at 99.644,25.06 h1.52 r90
  text "S1" at 18.527,23.646 h0.76
  text "D1:    s   +   -" at -0.051,22.938 h1.52
  text "S2" at 18.527,21.086 h0.76
  text "D2:    s   +   -" at -0.051,20.384 h1.52
  text "S3" at 18.527,18.527 h0.76
  text "D3:    s   +   -" at -0.051,17.831 h1.52
  text "REV.POLARITY" at 13.405,14.305 h1.52
  text "Power" at 99.644,13.457 h1.52 r90
  text "U dig OUT" at 25.4,6.517 h1.52 r90
  text "3V3" at 25.227,5.156 h0.76
  text "5V" at 33.627,5.156 h0.76
  text "Battery" at 99.644,1.854 h1.52 r90
Bottom Overlay:
  drawing of 6735 lines, arcs and shapes, not listed
  text "BAT 1 -" at 25.375,14.935 h1.52 r90
  text "V bat" at 27.915,14.935 h1.52 r90
  text "BAT 1 -" at 30.455,14.935 h1.52 r90
  text "/ JP \" at 31.115,14.935 h1.52 r180
  text "GND" at 38.075,14.935 h1.52 r90
  text "GND" at 32.995,12.598 h1.52 r90
  text "(BAT 1 -)" at 35.535,12.598 h1.02 r90
  text "PES Board 2023 boro" at 69.469,9.169 h0.76
Mechanical 1:
  the board outline again, w0.254